# Altium PCB zigo_pcb.PcbDoc
Units mm, origin at the board's own origin, x right, y up, seen from the top; angles counter-clockwise.
Board outline 88 x 74.5 mm, 2 copper layers (Top Layer, Bottom Layer); 37 components, 30 nets, 181 pads, 0 vias.
Unrouted connection lines stored in the file: 9.
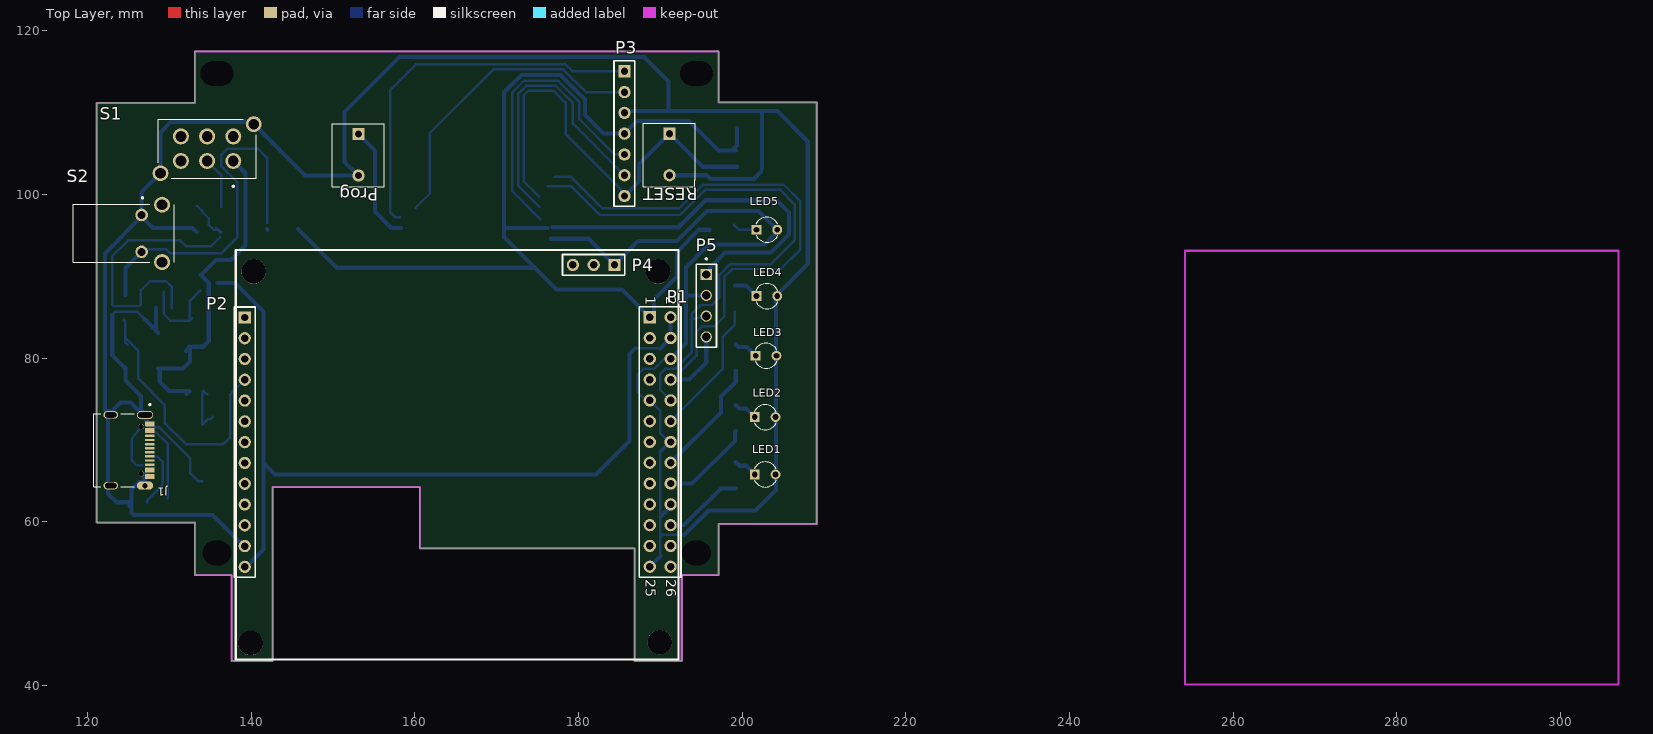
[diagram p0: Top Layer view]
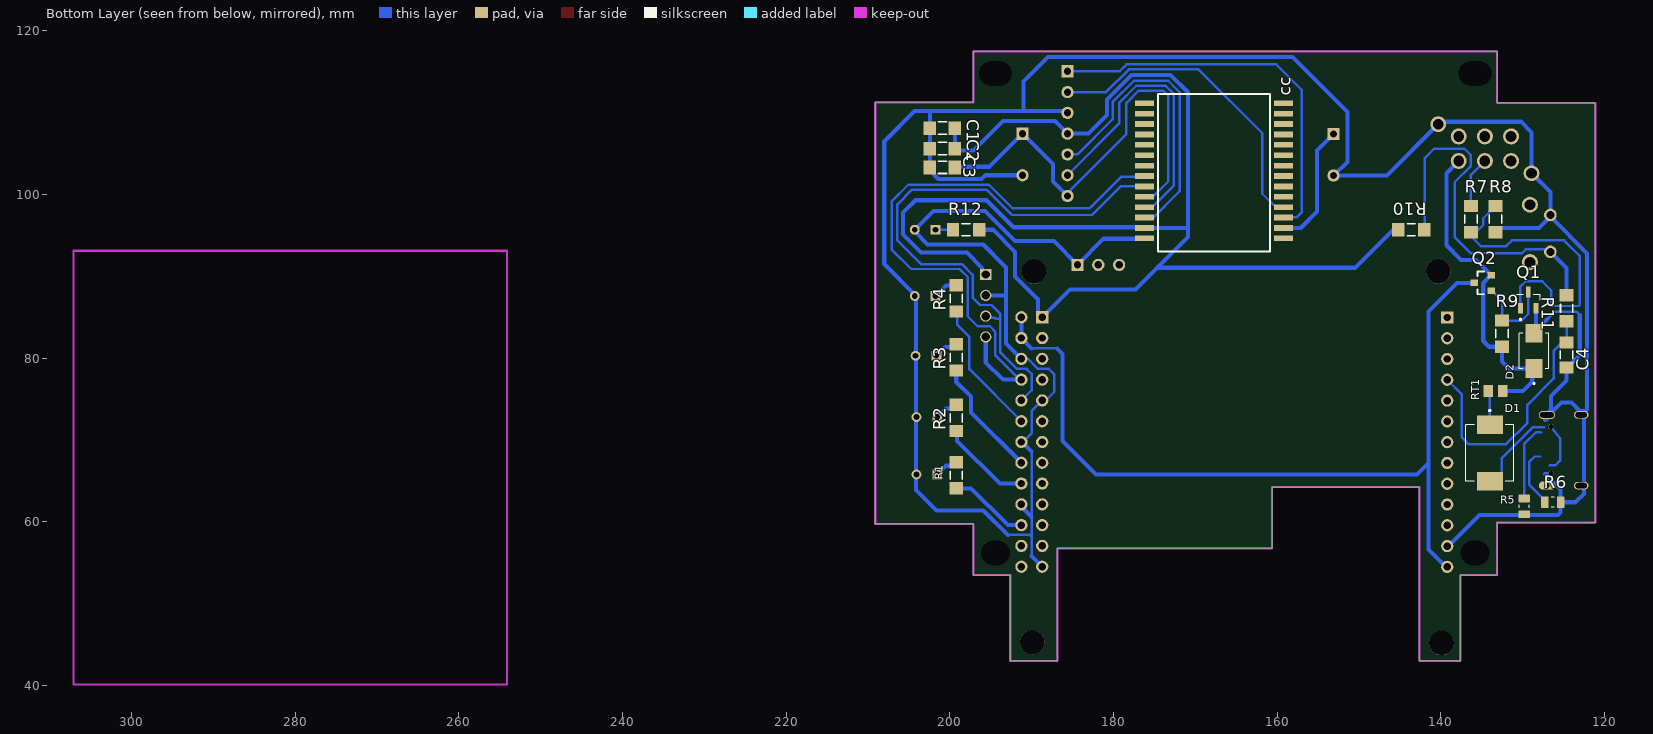
[diagram p1: Bottom Layer view, seen from below]
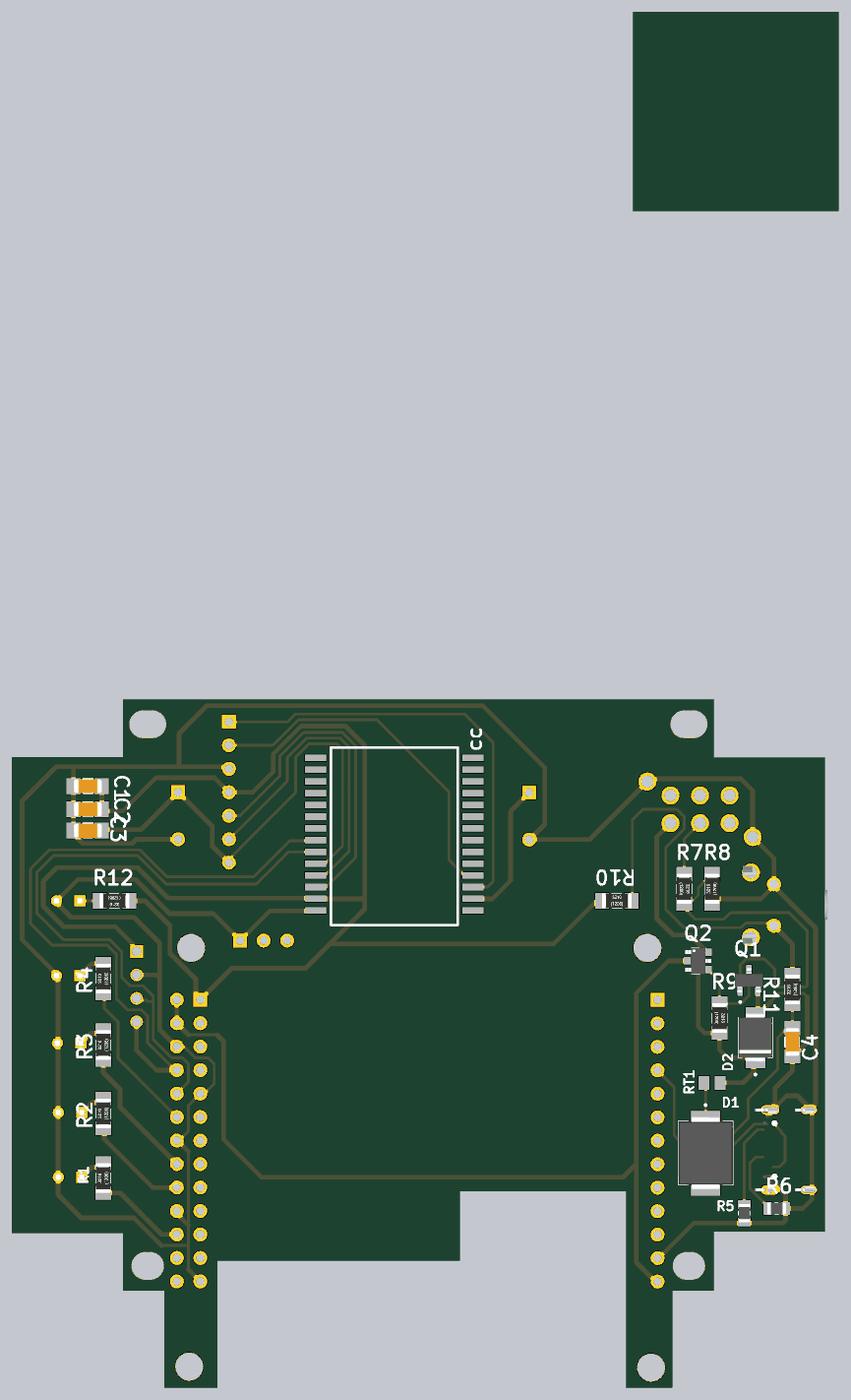
[diagram p2: 3D render of the assembled board from below, using the file's embedded part models]

## Layer stack, top to bottom
Top Solder: solder mask 0.0102, Solder Resist, Dk 3.5
Top Layer: signal copper 0.0356
Dielectric 1: dielectric 0.32, FR-4, Dk 4.8
Bottom Layer: signal copper 0.0356
Bottom Solder: solder mask 0.0102, Solder Resist, Dk 3.5

## Board outline
137.6,43 142.6,43 142.6,64.25 160.6,64.25 160.6,56.75 186.85,56.75 186.85,43 192.6,43 192.6,53.5 197.1,53.5 197.1,59.75 209.1,59.75 209.1,111.25 197.1,111.25 197.1,117.5 190.8,117.5 139.6,117.5 133.1,117.5 133.1,111.2 121.1,111.2 121.1,59.9 133.1,59.9 133.1,53.5 137.6,53.5
cut-out: 119.6,170.327 119.6,191.9 141.863,191.9 141.863,170.327

## Design rules (kind name [scope] priority, off if disabled: settings)
Clearance Type-C [HasFootprint('VALCON_CSP-USC16-TR')] p1: gap=0.127 ignorepadtopadclearanceinfootprint=FALSE
Clearance [All] p2: gap=0.3 ignorepadtopadclearanceinfootprint=FALSE
PolygonConnect [All] p1: connectstyle=Relief reliefconductorwidth=0.254 reliefentries=4 polygonreliefangle="90 Angle" airgapwidth=0.254
RoutingVias [All] p1: holewidth=0.711 width=1.27 viastyle="Through Hole" minholewidth=0.711 minwidth=1.27 maxholewidth=0.711 maxwidth=1.27
SolderMaskExpansion [All] p1: expansion=0.102 istentingtop=FALSE
Width [All] p1: maxlimit=2 minlimit=0.3 preferedwidth=0.5 minimp=50.000000 maximp=50.000000 favimp=50.000000
Width Width_1 [All] p2: maxlimit=1 minlimit=0.254 preferedwidth=0.5 minimp=50.000000 maximp=50.000000 favimp=50.000000
30 further rules are at their usual default settings.

## Components (designator, comment, footprint, x,y, rotation, side; value= is the part's Value field where it differs from the comment)
C1 "10 uf" "CAP SMD" 200.9,108.1 r180 bottom
C2 "100 nf" "CAP SMD" 200.9,105.6 r180 bottom
C3 "100 nf" "CAP SMD" 200.9,103.3 r180 bottom
C4 "100 nf" "CAP SMD" 124.6,80.4 r90 bottom
cc "RF-BM-2652P2" "PCBCOMPONENT_1 - DUPLICATE" 167.7,108.1 r180 bottom
D1 "SS34" DIOM7959X265N 134,68.4 r270 bottom
D2 "SMBJ5.0A" DIOM4336X265N 128.6,80.9 r90 bottom
J1 "CSP-USC16-TR" VALCON_CSP-USC16-TR 127.6,68.75 r270 top
LED1 "OVLAW4CB7" LEDRD254W50D305H520P 202.8,65.8 r0 top
LED2 "OVLAW4CB7" LEDRD254W50D305H520P 202.8,72.8 r0 top
LED3 "OVLAW4CB7" LEDRD254W50D305H520P 202.9,80.3 r0 top
LED4 "OVLAW4CB7" LEDRD254W50D305H520P 203,87.6 r0 top
LED5 "OVLAW4CB7" LEDRD254W50D305H520P 203,95.7 r0 top
P1 "Header 13X2" HDR2X13 188.7,85 r270 top
P2 "Header 13" HDR1X13 139.2,84.98 r270 top
P3 "Header 7" HDR1X7 185.6,115.06 r270 top
P4 "Header 3" HDR1X3 184.38,91.4 r180 top
P5 "HTSW-104-07-G-S" SAMTEC_HTSW-104-07-G-S 195.6,86.41 r90 top
Prog "Push Button" "PUSH BUTTON" 153.1,104.86 r180 top
Q1 "BC817-40" SOT95P240X120-3N 129.3,87.1 r90 bottom
Q2 "AO3401A" SOT23-3 134.8,89.2 r180 bottom
R1 "SMD" "RESISTOR SMD 1206" 199.2,65.7 r90 bottom
R2 "SMD" "RESISTOR SMD 1206" 199.2,72.7 r90 bottom
R3 "SMD" "RESISTOR SMD 1206" 199.2,80.1 r90 bottom
R4 "SMD" "RESISTOR SMD 1206" 199.2,87.3 r90 bottom
R5 "SR0805JR-7W5K1L" RESC2012X60N 129.8,61.9 r90 bottom
R6 "SR0805JR-7W5K1L" RESC2012X60N 126.3,62.4 r0 bottom
R7 "1K" "Resistor SMD 1206" 136.3,97 r270 bottom
R8 "10K" "Resistor SMD 1206" 133.3,97 r90 bottom
R9 "10K" "Resistor SMD 1206" 132.5,83 r270 bottom
R10 "10k" "RESISTOR SMD 1206" 143.6,95.7 r180 bottom
R11 "10k" "RESISTOR SMD 1206" 124.6,86.1 r90 bottom
R12 "SMD" "Resistor SMD 1206" 198,95.7 r0 bottom
RESET "Push Button" "PUSH BUTTON" 191.1,104.9 r180 top
RT1 "PRG21BC0R6MM1RA" THRMC2012X110N 133.3,76 r180 bottom
S1 "SPPJ222200" SW_SPPJ222200 134.6,105.6 r180 top
S2 "FSMRA4JH04" FSMRA4JH04 127.845,95.25 r270 top

## Footprints (in the part's own frame and the unit in brackets; to place one, negate y for a bottom-side part, rotate by r counter-clockwise, add the part's x,y. Pads: shape width x height; smd on the part's side, far side on the other; paste and mask are expansions set on the pad)
"CAP SMD" [mm]
  rect 1.5x1.7 smd: 1(-1.525,0) 2(1.525,0)
  Top Layer pour cut-out: 0.762,0.762 -0.762,0.762 -0.762,-0.762 0.762,-0.762
  silkscreen extent -0.47,-0.72 0.53,0.78, body extent -1.49,-0.76 1.55,0.76, height 0.75
DIOM4336X265N [mm]
  rect 2.28x2.12 smd: A(2.165,0) C(-2.165,0)
  silkscreen extent -4.1,-1.81 2.16,1.81, body extent -2.67,-1.81 2.67,1.81, height 2.65
DIOM7959X265N [mm]
  rect 2.25x3.18 smd: A(3.455,0) C(-3.455,0)
  silkscreen extent -5.3,-2.95 3.44,2.95, body extent -3.98,-2.95 3.98,2.95, height 2.65
FSMRA4JH04 [mm]
  round 1.54 hole 0.99: 1(-2.25,-1.245) 2(2.25,-1.245)
  round 1.95 hole 1.3: 3(3.505,1.245) 4(-3.505,1.245)
  silkscreen extent -4.45,-9.6 3.56,2.76, body extent -4.21,-7 4.21,2.66, height 7.01
HDR1X3 [mm] "Connector; Header; 3 Position"
  rect 1.5x1.5 hole 0.9: 1(0,0)
  round 1.5 hole 0.9: 2(2.54,0) 3(5.08,0)
  silkscreen extent -1.27,-1.27 6.35,1.27
HDR1X7 [mm] "Connector; Header; 7 Position"
  rect 1.5x1.5 hole 0.9: 1(0,0)
  round 1.5 hole 0.9: 2(2.54,0) 3(5.08,0) 4(7.62,0) 5(10.16,0) 6(12.7,0) 7(15.24,0)
  silkscreen extent -1.27,-1.27 16.51,1.27
HDR1X13 [mm] "Connector; Header; 13 Position"
  rect 1.5x1.5 hole 0.9: 1(0,0)
  round 1.5 hole 0.9: 2(2.54,0) 3(5.08,0) 4(7.62,0) 5(10.16,0) 6(12.7,0) 7(15.24,0) 8(17.78,0) 9(20.32,0) 10(22.86,0) 11(25.4,0) 12(27.94,0) 13(30.48,0)
  silkscreen extent -1.27,-1.27 31.75,1.27
HDR2X13 [mm] "Connector; Header; 13x2 Position"
  rect 1.5x1.5 hole 0.9: 1(0,0)
  round 1.5 hole 0.9: 2(0,2.54) 3(2.54,0) 4(2.54,2.54) 5(5.08,0) 6(5.08,2.54) 7(7.62,0) 8(7.62,2.54) 9(10.16,0) 10(10.16,2.54) 11(12.7,0) 12(12.7,2.54) 13(15.24,0) 14(15.24,2.54) 15(17.78,0) 16(17.78,2.54) 17(20.32,0) 18(20.32,2.54) 19(22.86,0) 20(22.86,2.54) 21(25.4,0) 22(25.4,2.54) 23(27.94,0) 24(27.94,2.54) 25(30.48,0) 26(30.48,2.54)
  silkscreen extent -1.27,-1.27 31.75,3.81
LEDRD254W50D305H520P [mm]
  rect 1.208x1.208 / inner round 1.208 / far side rect 1.208x1.208 hole 0.7: A(-1.27,0)
  round 1.208 hole 0.7: C(1.27,0)
  silkscreen extent -1.34,-1.54 1.36,1.52, body extent -1.59,-1.9 1.89,1.9, height 6.71
"PCBCOMPONENT_1 - DUPLICATE" [mm]
  rect 2.3x0.7 smd paste+0 mask+0.102: 1(-8.509,3.053) 2(-8.509,1.783) 3(-8.509,0.513) 4(-8.509,-0.757) 5(-8.509,-2.027) 6(-8.509,-3.297) 7(-8.509,-4.567) 8(-8.509,-5.837) 9(-8.509,-7.107) 10(-8.509,-8.377) 11(-8.509,-9.647) 12(-8.509,-10.917) 13(-8.509,-12.187) 14(-8.509,-13.457) 15(8.509,-13.457) 16(8.509,-12.187) 17(8.509,-10.917) 18(8.509,-9.647) 19(8.509,-8.377) 20(8.509,-7.107) 21(8.509,-5.837) 22(8.509,-4.567) 23(8.509,-3.297) 24(8.509,-2.027) 25(8.509,-0.757) 26(8.509,0.513) 27(8.509,1.783) 28(8.509,3.053)
  silkscreen extent -6.86,-15.04 6.86,4.19
"PUSH BUTTON" [mm]
  rect 1.5x1.5 hole 0.9: 1(0,-2.54)
  round 1.5 hole 0.9: 2(0,2.54)
  silkscreen extent -3.13,-3.81 3.19,3.94
RESC2012X60N [mm]
  rrect15% 0.92x1.38 smd: 1(-0.955,0) 2(0.955,0)
  silkscreen extent -0.17,-0.63 0.17,0.63, body extent -1,-0.63 1,0.63, height 0.6
"RESISTOR SMD 1206" [mm]
  rect 1.5x1.7 smd: 1(-1.6,0) 2(1.6,0)
  Top Layer pour cut-out: 0.889,0.889 -0.889,0.889 -0.889,-0.889 0.889,-0.889
  silkscreen extent -0.5,-0.75 0.5,0.75, body extent -1.6,-0.8 1.6,0.8, height 0.55
"Resistor SMD 1206" [mm]
  rect 1.5x1.7 smd: 1(-1.6,0) 2(1.6,0)
  Top Layer pour cut-out: 0.889,0.889 -0.889,0.889 -0.889,-0.889 0.889,-0.889
  silkscreen extent -0.5,-0.75 0.5,0.75, body extent -1.6,-0.8 1.6,0.8, height 0.55
SAMTEC_HTSW-104-07-G-S [mm]
  rect 1.37x1.37 / inner round 1.37 / far side rect 1.37x1.37 hole 1.02: 01(3.81,0)
  round 1.37 hole 1.02: 02(1.27,0) 03(-1.27,0) 04(-3.81,0)
  silkscreen extent -5.08,-1.24 5.83,1.24
SOT23-3 [mm]
  rect 0.9x0.8 smd: 1(1,-0.95) 2(1,0.95) 3(-1.1,0)
  silkscreen extent -0.7,-1.4 0.1,1.4, body extent -1.4,-1.45 1.4,1.45, height 1.25
SOT95P240X120-3N [mm]
  rrect25% 1.32x0.6 smd: 1(-1,0.95) 2(-1,-0.95) 3(1,0)
  silkscreen extent -2.45,-1.45 0.65,1.45, body extent -1.3,-1.53 1.3,1.52, height 1.3
SW_SPPJ222200 [mm]
  round 1.95 hole 1.3: 1(-3.2,1.5) 2(0,1.5) 3(3.2,1.5) 4(-3.2,-1.5) 5(0,-1.5) 6(3.2,-1.5) S1(-5.7,-3) S2(5.7,3)
  silkscreen extent -6,-3.6 6,4.7
THRMC2012X110N [mm]
  rect 1.15x1.47 smd: 1(-0.88,0) 2(0.88,0)
VALCON_CSP-USC16-TR [mm]
  rect 0.3x1.14 smd: A1(-3.35,0) A4(-2.55,0) A5(-1.25,0) A6(-0.25,0) A7(0.25,0) A8(1.25,0) A9(2.55,0) A12(3.35,0) B1(3.05,0) B4(2.25,0) B5(1.75,0) B6(0.75,0) B7(-0.75,0) B8(-1.75,0) B9(-2.25,0) B12(-3.05,0)
  oval 1x2 hole 0.65 slot 1.72 at 90 deg: S1(-4.325,-0.59)
  oval 1x2 hole 0.65: S2(4.325,-0.59)
  oval 0.9x1.8 hole 0.65 slot 1.4 at 90 deg: S3(-4.325,-4.77) S4(4.325,-4.77)
  round 0.65 hole 0.65 unplated: ""(-2.89,-1.07) ""(2.89,-1.07)
  silkscreen extent -5.67,-6.86 4.47,0.1, body extent -4.47,-6.28 4.47,1.47, height 3.26

## Part data
C1 C2 C3 C4: library part "Cap SMD"
D1: "Diode Schottky 40 V 3A Surface Mount SMC (DO-214AB)", Package="SMC-2 ON Semiconductor", Check_prices=https://www.snapeda.com/parts/SS34/Onsemi/view-part/?ref=eda, MF=onsemi, MP=SS34, SnapEDA_Link=https://www.snapeda.com/parts/SS34/Onsemi/view-part/?ref=snap
D2: "600W, 6.7V, 5%, Unidirectional, TVS", Package="SMD-2 Taiwan Semiconductor", Check_prices=https://www.snapeda.com/parts/SMBJ5.0A/taiwan/view-part/?ref=eda, MF="Taiwan Semiconductor", MP=SMBJ5.0A, SnapEDA_Link=https://www.snapeda.com/parts/SMBJ5.0A/taiwan/view-part/?ref=snap
J1 P5 RT1: Package=None, Availability=Unavailable, Price=None
  J1: MF="{'manufacturer': u'Valcon'}", MP=CSP-USC16-TR
  P5: MP=HTSW-104-07-G-S
  RT1: MP=PRG21BC0R6MM1RA
LED1 LED2 LED3 LED4 LED5: "Ovlaw4Cb7 White LED 3mm (T-1) Round Lens Through Hole Package", Package=Package, Check_prices=https://www.snapeda.com/parts/OVLAW4CB7/TT+Electronics%252FOptek/view-part/?ref=eda, MF="TT Electronics/Optek", MP=OVLAW4CB7, SnapEDA_Link=https://www.snapeda.com/parts/OVLAW4CB7/TT+Electronics%252FOptek/view-part/?ref=snap
P1: "Header, 13-Pin, Dual row", LatestRevisionDate=17-Jul-2002, LatestRevisionNote="Re-released for DXP Platform.", Publisher="Altium Limited"
P2: "Header, 13-Pin", LatestRevisionDate=17-Jul-2002, LatestRevisionNote="Re-released for DXP Platform.", Publisher="Altium Limited"
P3: "Header, 7-Pin", LatestRevisionDate=17-Jul-2002, LatestRevisionNote="Re-released for DXP Platform.", Publisher="Altium Limited"
P4: "Header, 3-Pin", LatestRevisionDate=17-Jul-2002, LatestRevisionNote="Re-released for DXP Platform.", Publisher="Altium Limited"
Q1: "BJT, SOT-23, 45V, 800mA, NPN, 0.31W, 150Â°C", Package="SOT-23 Diotec", Check_prices=https://www.snapeda.com/parts/BC817-40/Diotec/view-part/?ref=eda, MF="Diotec Semiconductor", MP=BC817-40, SnapEDA_Link=https://www.snapeda.com/parts/BC817-40/Diotec/view-part/?ref=snap
Q2: "P-Channel 30 V 4A (Ta) 1.4W (Ta) Surface Mount SOT-23-3", Package="SOT-23 Alpha &amp; Omega Semiconductor", Check_prices=https://www.snapeda.com/parts/AO3401A/Alpha/view-part/?ref=eda, MF="Alpha & Omega Semiconductor", MP=AO3401A, SnapEDA_Link=https://www.snapeda.com/parts/AO3401A/Alpha/view-part/?ref=snap
R1 R2 R3 R4 R7 R8 R9 R10 R11 R12: library part "Res SMD"
R5 R6: "RES 5.1K OHM 5% 1/4W 0805", Package="0805-2 YAGEO", Check_prices=https://www.snapeda.com/parts/SR0805JR-7W5K1L/Yageo/view-part/?ref=eda, MF=Yageo, MP=SR0805JR-7W5K1L, SnapEDA_Link=https://www.snapeda.com/parts/SR0805JR-7W5K1L/Yageo/view-part/?ref=snap
S1: "Switch Push Button N.O./N.C. DPDT Plunger 0.2A 30VDC Latching PC Pins Bracket Mount/Through Hole Bulk", Package=None, Availability=Warning, MF=ALPS, Mouser-Purchase-URL=https://snapeda.com/shop?store=Mouser&id=699467, MP=SPPJ222200, Price=None, SnapEDA_Link=https://www.snapeda.com/parts/SPPJ222200/ALPS/view-part/699467/?ref=snap
S2: "Switch, Pushbutton, Tactile, Single Pole, 50mA, Right Angle", Package=None, Availability=Good, Check_prices=https://www.snapeda.com/parts/FSMRA4JH04/TE%20Connectivity/view-part/45679/?ref=eda, MF="TE Connectivity", MP=FSMRA4JH04, Price=None, Purchase-URL=https://pricing.snapeda.com/search/part/FSMRA4JH04/?ref=eda, SnapEDA_Link=https://www.snapeda.com/parts/FSMRA4JH04/TE%20Connectivity/view-part/45679/?ref=snap

## Free pads (board coordinates)
  round 0 hole 3 slot 4 at 0 deg: 1(135.8,114.8) 1(194.4,114.8)
  round 3 hole 3: 1(139.9,45.2) 1(189.9,45.3) 3(140.3,90.6) 4(189.7,90.6)
  round 0 hole 3 slot 3.5 at 0 deg: 1(194.4,56.2) 5(135.8,56.2)

## Nets (pads, with @x,y where several pads share a name; then routed paths per layer and width w, separated by ;. In a path a pad name is that pad's centre, name@x,y a point inside that pad or via, vN(x,y) a via of type N, cw(c..) or ccw(c..) an arc to the next point about the centre after c; other vN are vias at no path point)
3.3v: C1.2 C2.2 cc.13 P1.1 P3.4 P5.01 R10.1 R12.1 | length 174.3
  Bottom Layer w0.5: R10.1@145.704,95.796 150.45,91.05 174.65,91.05 ; cc.13@176.196,95.9 170.9,95.9 ; cc.13@176.8,96 192.2,96 195.5,99.3 204.2,99.3 205.7,97.8 205.7,95.1 203.5,92.9 197.9,92.9 196.035,91.035 196.035,90.655 P5.01 ; R12.1@195.975,95.7 194.7,95.7 192,93 192,90 189.2,87.2 189.2,85.5 P1.1 185.3,88.4 177.3,88.4 174.65,91.05 ; C2.2@198.975,105.7 198.975,105.6 199.375,106 C1.2 ; C2.2@199.2,105.4 197.1,105.4 193.5,109 187.16,109 P3.4 183.06,107.44 180.8,109.7 180.8,111.6 177.8,114.6 173,114.6 170.9,112.5 170.9,95.9 ; 170.9,95.9 170.9,94.8 174.65,91.05
+5: D2.C Q2.2 R9.2 RT1.2 S1.1 | length 41.9
  Bottom Layer w0.5: R9.2@132,80.9 R9.2 ; RT1.2@132.095,75.6 RT1.2@132.36,75.865 ; R9.2@132.4,81.4 R9.2 ; R9.2@132.9,81.4 134.1,81.4 134.8,82.1 134.8,89.2 Q2.2@133.85,90.15 ; Q2.2 Q2.2@133.85,90.15 ; S1.1 139.3,102.6 139.3,93.8 137.5,92 135.7,92 Q2.2@133.85,90.15 ; RT1.2@132.36,75.865 132.42,75.925 RT1.2 ; RT1.2@132.36,75.865 132.36,75.94 RT1.2 ; RT1.2 129.945,76 128.807,77.138 128.807,78.528 D2.C 131.635,78.735 132.5,79.6 R9.2
GND: C1.1 C2.1 C3.1 C4.1 cc.14 D2.A J1.A1 J1.A12 J1.B1 J1.B12 J1.S1 J1.S2 J1.S3 J1.S4 LED1.C LED2.C LED3.C LED4.C LED5.C P1.6 P1.9 P1.14 P1.20 P1.25 P2.12 P3.3 P4.1 P5.02 Prog.2 Q1.2 R5.1 R6.1 R8.1 RESET.2 S1.S1 S1.S2 S2.1 | length 390.2
  Bottom Layer w0.3: 123,85.3 123.4,85.7 126.045,85.7 126.945,84.8 ; P2.12@138.87,56.69 P2.12@139.1,56.46 ; P1.9@188.2,74.9 187.2,75.9 187.2,78 187.9,78.7 189.2,78.7 190.4,79.9 191.22,79.9 P1.6 ; P1.9@188.7,74.8 P1.9 ; P1.9@189.025,74.84 P1.9 ; 190,55.82 190,58.21 ; 190,68.6 190,60.6 190,58.21 ; P1.14 191.16,69.76 191.04,69.76 190,70.8 190,73.54 P1.9 ; 192.9,58.4 190.19,58.4 190,58.21
  Bottom Layer w0.5: 123,85.3 123,80.375 124.5,78.875 C4.1 124.6,77.3 126.5,75.4 126.5,73.695 J1.S1@126.68,73.515 ; R6.1@125.135,61.96 R6.1@125.345,62.17 ; 126.945,84.8 D2.A@128.35,83.395 ; J1.S1@127,73.284 J1.S1@126.975,73.284 ; 127.075,72.54 126.975,72.64 J1.S1@126.975,73.284 ; 127.27,65.84 127.075,65.84 126.975,65.74 126.975,65.096 126.744,64.865 126.278,64.865 125.345,63.932 R6.1 R6.1@125.345,62.19 ; 127.27,72.44 127.27,72.54 ; Q1.2 D2.A@128.35,83.395 ; R8.1 132.8,95.9 128,95.9 S2.1@126.6,97.3 ; P2.12@139.3,56.8 135.255,60.845 125.655,60.845 125.345,61.155 R6.1@125.345,62.17 ; Prog.2@152.9,102.5 151.4,104 151.4,110.1 158.1,116.8 188,116.8 191,113.8 191,110.2 ; Prog.2 146.58,102.32 S1.S1 140.023,108.877 139.305,108.877 139.282,108.9 130.2,108.9 128.9,107.6 S1.S2 126.6,100.3 S2.1 S2.1@126.6,97.3 ; cc.14@176.6,94.6 181.18,94.6 P4.1 187.28,94.3 192,94.3 195.7,98 201.97,98 LED5.C ; P3.3 185.791,110.171 186.364,110.171 186.393,110.2 191,110.2 ; P1.25 190,55.82 ; 190,60.6 190.829,61.429 190.829,61.459 191.24,61.869 P1.20 ; 190,68.6 P1.14@191.16,69.76 ; RESET.2 195.64,102.36 196.1,101.9 201.4,101.9 C3.1@202.3,102.8 ; P1.6 193.1,81.78 193.1,87.4 ; 192.9,58.4 195.9,61.4 201.6,61.4 204.1,63.9 204.1,72.8 204.1,87.6 208,91.5 208,106.5 204.3,110.2 202.5,110.2 ; P5.02 193.38,87.68 193.1,87.4 ; C3.1@202.425,103.2 C3.1 C2.1 C1.1 202.425,110.125 202.5,110.2 ; LED5.C@204.2,95.4 202.7,93.9 195.9,93.9 193.1,91.1 193.1,87.4 ; J1.S3@122.5,73.515 122.95,73.515 124.035,74.6 125.23,74.6 126.315,73.515 J1.S1@126.68,73.515 ; J1.S3@122.5,73.515 122.5,63.4 123.5,62.4 125.135,62.4 R6.1@125.345,62.19 ; J1.S3@122.5,73.515 122.285,73.515 122.1,73.7 122.1,92.8 S2.1@126.6,97.3 ; R6.1@125.345,62.17 R6.1@125.345,62.19 ; J1.S1@126.68,73.515 126.572,73.407 126.677,73.407 126.8,73.284 J1.S1@126.975,73.284 ; D2.A@128.35,83.395 128.35,83.315 D2.A 128.6,83.145 D2.A@128.35,83.395 ; 191,110.2 202.5,110.2
Input_OP: P1.2 P1.4 P2.13 Q2.3 | length 104.8
  Bottom Layer w0.3: 186.9,81.2 189.98,81.2
  Bottom Layer w0.5: Q2.3 138,89.2 141.5,85.7 141.5,67.2 ; P2.13@139.6,54.7 141.5,56.6 141.5,67.2 ; 186.9,81.2 186.2,80.5 186.2,69.9 182.1,65.8 151.567,65.8 142.9,65.8 141.5,67.2 ; 189.98,81.2 P1.4 P1.2
JTAG_TDI: cc.17 P3.1 | length 46.7
  Bottom Layer w0.3: cc.17@158.2,97.2 157.6,97.2 157,97.8 157,112.8 160.1,115.9 178.4,115.9 179.24,115.06 P3.1
JTAG_TDO: cc.18 P3.2 | length 38
  Bottom Layer w0.3: cc.18@160.1,98.4 161.8,100.1 161.8,107.5 169.6,115.3 178.1,115.3 180.88,112.52 P3.2
LED1: P1.22 R1.1 | length 9.8
  Bottom Layer w0.5: P1.22 192.9,59.6 197.4,64.1 R1.1
LED2: P1.18 R2.1 | length 11.3
  Bottom Layer w0.5: P1.18 193.88,64.68 199.093,69.893 199.093,70.993 R2.1
LED3: P1.16 R3.1 | length 14.6
  Bottom Layer w0.5: P1.16 197.4,73.38 197.4,75.3 199.2,77.1 R3.1
LED4: P1.12 R4.1 | length 16.7
  Bottom Layer w0.3: P1.12 197.6,78.66 197.6,82.6 199.1,84.1 R4.1@199.1,85.7
Netcc_16: cc.16 Prog.1 | length 14.4
  Bottom Layer w0.5: Prog.1 155.1,105.4 155.1,97.9 157.1,95.9 cc.16@158.3,95.9
NetD1_C: D1.C RT1.1 | length 6.5
  Bottom Layer w0.3: RT1.1@134.605,75.575 RT1.1 134,75.82 D1.C 134.7,72.555 135,72.555 D1.C@135.275,72.83
NetJ1_A5: J1.A5 R6.2 | length 7.4
  Bottom Layer w0.254: 127.8,67.963 128.537,67.963
  Bottom Layer w0.3: R6.2 127.255,62.63 129.2,64.575 129.2,67.3 128.537,67.963
NetJ1_B5: J1.B5 R5.2 | length 9.4
  Bottom Layer w0.254: 127.7,70.9 127.75,70.95 128.35,70.95
  Bottom Layer w0.3: 128.35,70.95 129.8,69.5 R5.2
NetLED1_A: LED1.A R1.2 | length 3
  Bottom Layer w0.5: R1.2 199.639,66.861 200.469,66.861 LED1.A
NetLED2_A: LED2.A R2.2 | length 3
  Bottom Layer w0.5: R2.2 199.639,73.861 200.469,73.861 LED2.A
NetLED3_A: LED3.A R3.2 | length 3
  Bottom Layer w0.5: R3.2 199.539,81.361 200.569,81.361 LED3.A
NetLED4_A: LED4.A R4.2 | length 3.2
  Bottom Layer w0.5: R4.2@199.1,88.9 200.43,88.9 LED4.A
NetLED5_A: LED5.A R12.2 | length 3
  Bottom Layer w0.3: R12.2@199,96.3 R12.2 LED5.A
NetQ1_1: Q1.1 R7.2 R8.2 | length 38.7
  Bottom Layer w0.3: Q1.1 130.25,88.75 129.6,89.4 127.6,89.4 126.5,88.3 126.5,86.551 126.324,86.376 123.176,86.376 123,86.551 123,92.492 124.908,94.4 131.3,94.4 132,93.7 135.1,93.7 R7.2@136.2,94.8 ; R8.2 133.4,98.6 134,98 134,97.9 134.8,97.1 134.8,96.3 135.425,95.675 R7.2@135.925,95.675 ; R7.2@135.682,95.918 R7.2@135.925,95.675 ; R7.2@136.1,95.5 R7.2@135.925,95.675 ; R7.2@136.2,95.4 R7.2 136.025,95.675 R7.2@135.925,95.675
NetQ1_3: Q1.3 Q2.1 R9.1 | length 10.9
  Bottom Layer w0.3: Q1.3 129.3,85.4 130.1,84.6 R9.1 ; R9.1@132.8,84.9 R9.1 ; Q2.1 133.75,88.25 132.5,87 R9.1
NetR7_1: R7.1 S1.2 | length 6.3
  Bottom Layer w0.3: S1.2 136.3,102.4 R7.1@136.3,98.5
NetR10_2: R10.2 R11.2 S2.2 | length 43.9
  Bottom Layer w0.3: S2.2@126.9,93.3 129.6,93.3 130.1,92.8 136.3,92.8 138.3,94.8 138.3,101.5 136.3,103.5 136.3,104.8 137.1,105.6 140.8,105.6 141.925,104.475 141.925,96.575
  Bottom Layer w0.5: R11.2 124.6,91 S2.2 ; R10.2@141.9,95.8 R10.2
RESET: C3.2 cc.10 P3.7 RESET.1 | length 53.4
  Bottom Layer w0.3: cc.10@175.2,99.7 173.3,101.6 173.3,112.1 173.9,112.7 176.9,112.7 178.4,111.2 178.4,107.4 185.241,100.559 185.241,100.503 185.6,100.145 P3.7
  Bottom Layer w0.5: P3.7 187.4,101.62 187.4,103.74 RESET.1 ; RESET.1@191.14,107.48 RESET.1 ; C3.2@199.375,103.4 195.14,103.4 RESET.1
RESET_KEY: C4.2 P2.4 R11.1 | length 32.7
  Bottom Layer w0.3: R11.1@124.425,84.675 R11.1 C4.2 C4.2@124.899,81.626 ; C4.2@124.7,82.4 126.2,80.9 126.2,77.5 129.4,74.3 129.4,72.1 132,69.5 136.6,69.5 137.4,70.3 137.4,75.56 P2.4
RX: cc.8 P1.8 P5.04 | length 74.6
  Bottom Layer w0.3: cc.8@177.1,102.2 179,102.2 182.9,98.3 192.3,98.3 195.2,101.2 205.072,101.2 207.1,99.172 207.1,93.3 204.7,90.9 198.8,90.9 197.8,89.9 197.8,85.1 196.6,83.9 195.1,83.9 194.41,83.21 194.41,80.31 P1.8@191.48,77.38
  Bottom Layer w0.5: P1.8 191.48,77.38 193.48,77.38 195.6,79.5 P5.04
TCKC: cc.12 P3.5 | length 35.8
  Bottom Layer w0.3: cc.12@175.3,97 171.9,100.4 171.9,112.5 173.3,113.9 177.5,113.9 180.1,111.3 180.1,109.2 184.4,104.9 P3.5@185.3,104.9
TMSC: cc.11 P3.6 | length 34.3
  Bottom Layer w0.3: cc.11@175.2,98.5 172.6,101.1 172.6,112.29 173.61,113.3 177.2,113.3 179.3,111.2 179.3,108.66 P3.6
TX: cc.9 P1.10 P5.03 | length 71.3
  Bottom Layer w0.3: cc.9 179.107,100.993 182.6,97.5 192.4,97.5 195.5,100.6 204.6,100.6 206.4,98.8 206.4,94.4 203.5,91.5 198.5,91.5 197.2,90.2 197.2,87.4 196.3,86.5 194.9,86.5 193.8,85.4 193.8,84.8 ; P1.10 190,76.08 190,78.1 190.6,78.7 191.8,78.7 193.8,80.7 193.8,84.8 ; P5.03 195.395,84.935 194.506,84.935 194.37,84.8 193.8,84.8
VBUS: D1.A J1.A4 J1.A9 J1.B4 J1.B9 | length 16.6
  Bottom Layer w0.3: 126.7,66.9 126,66.9 125.408,67.492 125.408,70.221 126.284,71.291 126.492,71.5 126.7,71.5 ; 127.37,71.54 128.76,71.54 132.56,67.74 132.56,65.92 133.535,64.945 D1.A
pads on no net: cc.1 cc.2 cc.3 cc.4 cc.5 cc.6 cc.7 cc.15 cc.19 cc.20 cc.21 cc.22 cc.23 cc.24 cc.25 cc.26 cc.27 cc.28 J1. J1.A6 J1.A7 J1.A8 J1.B6 J1.B7 J1.B8 P1.3 P1.5 P1.7 P1.11 P1.13 P1.15 P1.17 P1.19 P1.21 P1.23 P1.24 P1.26 P2.1 P2.2 P2.3 P2.5 P2.6 P2.7 P2.8 P2.9 P2.10 P2.11 P4.2 P4.3 S1.3 S1.4 S1.5 S1.6 S2.3 S2.4

## Keep-outs
Keep-Out Layer:
  lines w0.254: 121.1,59.9 133.1,59.9 133.1,53.5 137.6,53.5 137.6,43 142.6,43 142.6,64.25 160.6,64.25 160.6,56.75 186.85,56.75 186.85,43 192.6,43 192.6,53.5 197.1,53.5 197.1,59.75 209.1,59.75 209.1,111.25 197.1,111.25 197.1,117.5 139.6,117.5 133.1,117.5 133.1,111.2 121.1,111.2 121.1,59.9 ; 254.1,40.127 307.1,40.127 307.1,93.127 254.1,93.127 254.1,40.127

## Silkscreen, mask and mechanical layers (free items; w line width, h text height)
Top Overlay:
  lines w0.254: 138.1,43.2 192.2,43.2 192.2,93.2 138.1,93.2 138.1,43.2
Mechanical 1:
  lines w0.254: 236.06,106.956 ccw(c235.933,109.623) 238.6,109.75

## Text inside footprints (layer, text, board x,y; h text height)
J1: Mechanical 13 "PCB Edge" at 121,70.82 h0.7 r270
P1: Top Overlay "26" at 190.732,52.996 h1.27 r270; Top Overlay "25" at 188.192,52.996 h1.27 r270; Top Overlay "1" at 188.192,87.54 h1.27 r270; Top Overlay "2" at 190.732,87.54 h1.27 r270